# Altium PCB Prog_Adaptor.PcbDoc
Units mm, origin at the board's own origin, x right, y up, seen from the top; angles counter-clockwise.
Board outline 29.35 x 21 mm, 2 copper layers (Top Layer, Bottom Layer); 3 components, 8 nets, 30 pads, 0 vias.
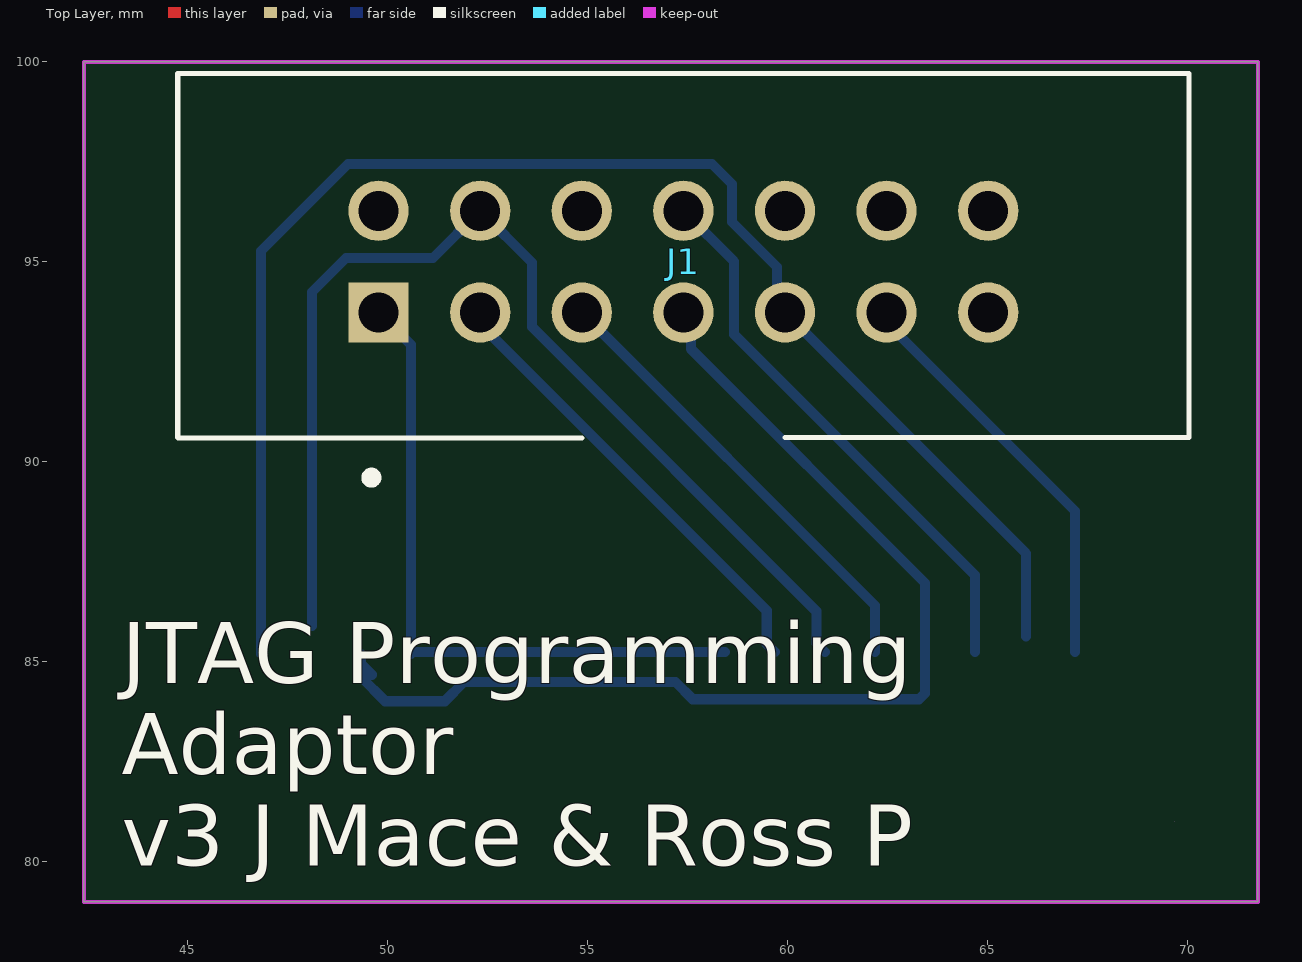
[diagram p0: Top Layer view]
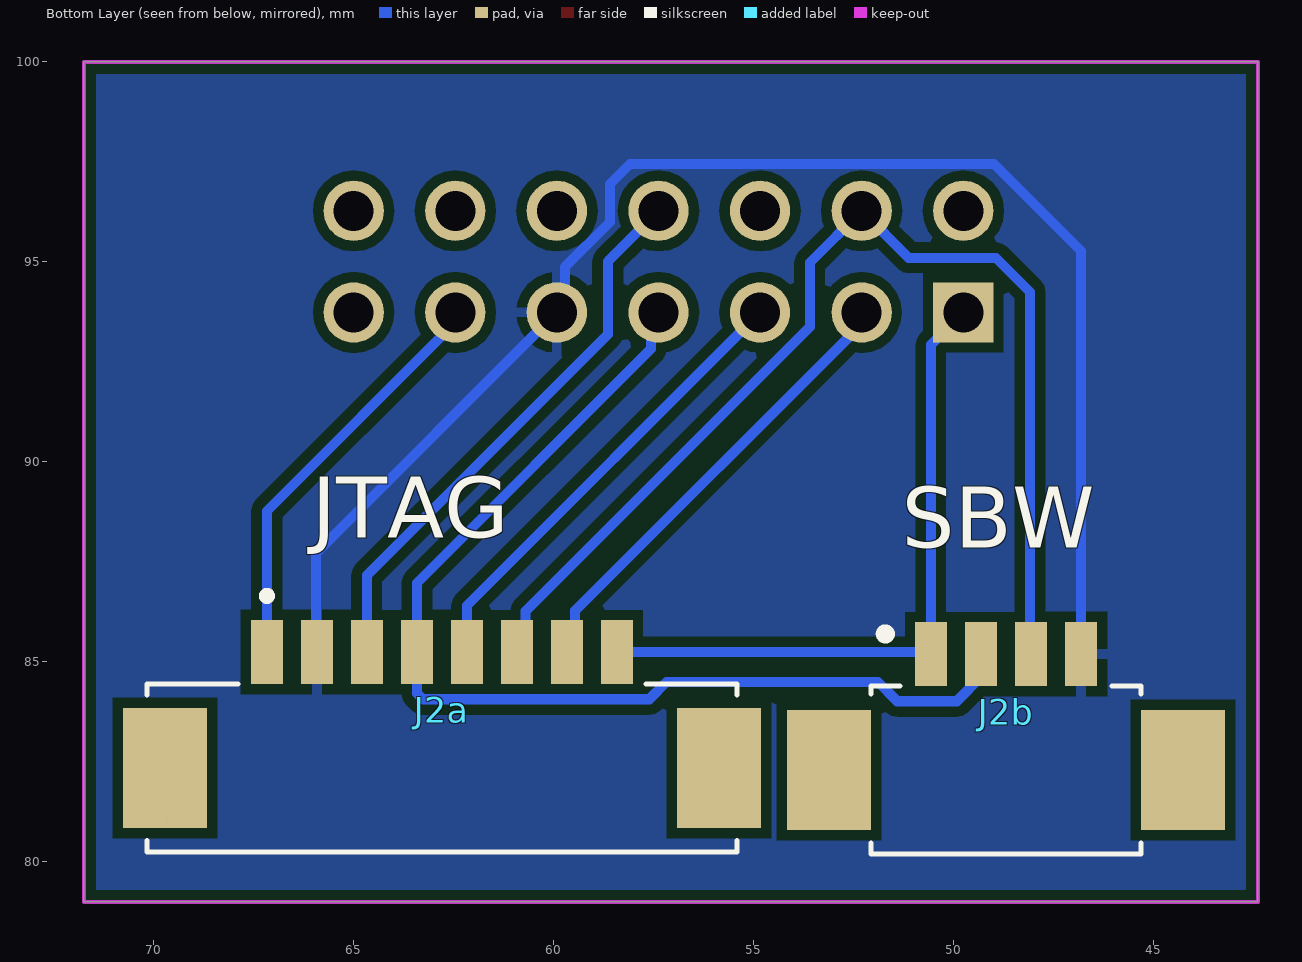
[diagram p1: Bottom Layer view, seen from below]

## Layer stack, top to bottom
Top Solder: solder mask 0.0102, Solder Resist, Dk 3.5
Top Layer: signal copper 0.0356
Dielectric 1: dielectric 0.32, FR-4, Dk 4.8
Bottom Layer: signal copper 0.0356
Bottom Solder: solder mask 0.0102, Solder Resist, Dk 3.5

## Board outline
42.4,100 71.75,100 71.75,79 42.4,79

## Design rules (kind name [scope] priority, off if disabled: settings)
Clearance [All] p1: gap=0.254 ignorepadtopadclearanceinfootprint=FALSE except(0: Arc-Hole Track-Hole SMDPad-Hole THPad-Hole Via-Hole Fill-Hole Poly-Hole Region-Hole Text-Hole)
PolygonConnect [All] p1: connectstyle=Relief reliefconductorwidth=0.254 reliefentries=4 polygonreliefangle="90 Angle" airgapwidth=0.254
RoutingVias [All] p1: holewidth=0.711 width=1.27 viastyle="Through Hole" minholewidth=0.711 minwidth=1.27 maxholewidth=0.711 maxwidth=1.27
SolderMaskExpansion [All] p1: expansion=0.102 istentingtop=FALSE
Width [All] p1: maxlimit=0.254 minlimit=0.254 preferedwidth=0.254
30 further rules are at their usual default settings.

## Components (designator, comment, footprint, x,y, rotation, side; value= is the part's Value field where it differs from the comment)
J1 "SBH11-PBPC-D07-ST-BK" SULLINS_SBH11-PBPC-D07-ST-BK 57.386,95.008 r0 top
J2a "0532610871" MOLEX_0532610871 62.8,82.35 r180 bottom
J2b "0532610471" MOLEX_0532610471 48.7,85.2 r180 bottom

## Footprints (in the part's own frame and the unit in brackets; to place one, negate y for a bottom-side part, rotate by r counter-clockwise, add the part's x,y. Pads: shape width x height; smd on the part's side, far side on the other; paste and mask are expansions set on the pad)
MOLEX_0532610471 [mm]
  rect 0.8x1.6 smd: 1(-1.875,0) 2(-0.625,0) 3(0.625,0) 4(1.875,0)
  rect 2.1x3 smd: S1(-4.425,-2.9) S2(4.425,-2.9)
  silkscreen extent -3.37,-5 3.37,0.62, body extent -5.05,-4.75 5.1,0.45, height 3.4
MOLEX_0532610871 [mm]
  rect 0.8x1.6 smd: 1(-4.375,2.9) 2(-3.125,2.9) 3(-1.875,2.9) 4(-0.625,2.9) 5(0.625,2.9) 6(1.875,2.9) 7(3.125,2.9) 8(4.375,2.9)
  rect 2.1x3 smd: S1(-6.925,0) S2(6.925,0)
  silkscreen extent -7.37,-2.1 7.37,4.4
SULLINS_SBH11-PBPC-D07-ST-BK [mm]
  rect 1.508x1.508 hole 1: 1(-7.62,-1.27)
  round 1.508 hole 1: 2(-7.62,1.27) 3(-5.08,-1.27) 4(-5.08,1.27) 5(-2.54,-1.27) 6(-2.54,1.27) 7(0,-1.27) 8(0,1.27) 9(2.54,-1.27) 10(2.54,1.27) 11(5.08,-1.27) 12(5.08,1.27) 13(7.62,-1.27) 14(7.62,1.27)
  silkscreen extent -12.64,-5.5 12.64,4.7

## Part data
J1: "Connector Header Through Hole 14 position 0.100 (2.54mm)", Package=None, Availability=Warning, Check_prices=https://www.snapeda.com/parts/SBH11-PBPC-D07-ST-BK/Sullins%20Connector%20Solutions/view-part/229418/?ref=eda, MF="Sullins Connector", MP=SBH11-PBPC-D07-ST-BK, Price=None, Purchase-URL=https://pricing.snapeda.com/search/part/SBH11-PBPC-D07-ST-BK/?ref=eda, SnapEDA_Link=https://www.snapeda.com/parts/SBH11-PBPC-D07-ST-BK/Sullins%20Connector%20Solutions/view-part/229418/?ref=snap
J2a: "Picoblade Connector, 8 Circuit Single Row, Right Angle Surface Mount SMT PCB", Package=None, Availability="In Stock", Check_prices=https://www.snapeda.com/parts/0532610871/Molex/view-part/?ref=eda, MF=Molex, MP=0532610871, Price=None, Purchase-URL=https://pricing.snapeda.com/search/part/0532610871/?ref=eda, SnapEDA_Link=https://www.snapeda.com/parts/0532610871/Molex/view-part/?ref=snap
J2b: "Picoblade Connector, 4 Circuit Single Row, Right Angle Surface Mount SMT PCB", Package=None, Availability="In Stock", Check_prices=https://www.snapeda.com/parts/0532610471/Molex/view-part/?ref=eda, MF=Molex, MP=0532610471, Price=None, Purchase-URL=https://pricing.snapeda.com/search/part/0532610471/?ref=eda, SnapEDA_Link=https://www.snapeda.com/parts/0532610471/Molex/view-part/?ref=snap

## Nets (pads, with @x,y where several pads share a name; then routed paths per layer and width w, separated by ;. In a path a pad name is that pad's centre, name@x,y a point inside that pad or via, vN(x,y) a via of type N, cw(c..) or ccw(c..) an arc to the next point about the centre after c; other vN are vias at no path point)
3v3: J1.4 J2a.6 J2b.3 | length 28
  Bottom Layer w0.254: J2b.3@48.1,85.9 48.1,94.25 48.95,95.1 51.128,95.1 J1.4 53.6,94.984 53.6,93.379 60.712,86.267 60.712,85.463 J2a.6
GND: J1.9 J2a.2 J2b.4 | length 37.3
  Bottom Layer w0.254: J2b.4 46.825,95.275 49,97.45 58.1,97.45 58.6,96.95 58.6,95.999 59.726,94.873 59.726,93.938 J1.9 65.95,87.714 J2a.2@65.95,85.635
Reset: J1.11 J2a.1 | length 10.4
  Bottom Layer w0.254: J1.11 62.466,93.484 67.175,88.775 J2a.1
TCK: J1.7 J2a.4 J2b.2 | length 27.8
  Bottom Layer w0.254: J2b.2@49.3,84.978 J2b.2@49.325,84.953 ; J2b.2 J2b.2@49.325,84.953 ; J2b.2@49.598,84.68 J2b.2@49.325,84.953 ; J1.7 57.573,93.551 57.573,92.827 63.425,86.975 J2a.4 63.425,84.218 63.276,84.069 57.619,84.069 57.187,84.5 51.9,84.5 51.419,84.019 49.931,84.019 49.325,84.625 J2b.2@49.325,84.953
TDI: J1.3 J2a.7 | length 11.5
  Bottom Layer w0.254: J1.3 52.306,93.444 59.472,86.278 59.472,85.453 J2a.7
TDO: J1.1 J2a.8 J2b.1 | length 16.7
  Bottom Layer w0.254: J1.1 50.575,92.929 J2b.1 ; J2b.1@50.6,85.25 J2a.8
TESTSWBT: J1.8 J2a.3 | length 14
  Bottom Layer w0.254: J1.8 58.65,95.014 58.65,93.192 64.675,87.167 J2a.3
TMS: J1.5 J2a.5 | length 11.5
  Bottom Layer w0.254: J1.5 62.175,86.409 J2a.5
pads on no net: J1.2 J1.6 J1.10 J1.12 J1.13 J1.14 J2a.S1 J2a.S2 J2b.S1 J2b.S2

## Polygon pours and split planes (outlines as drawn)
GND on Bottom Layer "GND" (solid, pour order 0): 42.65,100 42.65,79 71.75,79 71.75,100

## Keep-outs
Keep-Out Layer:
  lines w0.01: 69.655,81 cw(c69.65,81) 69.655,81 ccw(c67.65,81) 69.655,81 ; 69.655,81 ccw(c69.65,81) 69.655,81
  lines w0.1: 42.4,79 42.4,100 71.75,100 71.75,79 42.4,79

## Silkscreen, mask and mechanical layers (free items; w line width, h text height)
Top Overlay:
  lines w0.127: 44.75,90.6 54.85,90.6 ; 59.926,90.608 70.026,90.608
  text "JTAG Programming  / Adaptor / v3 J Mace & Ross P" at 43.35,79.9 h1.52
Bottom Overlay:
  text "JTAG" at 66.05,88.1 h1.52
  text "SBW" at 51.3,87.85 h1.52